# Altium PCB PCB1.PcbDoc
Units mil, origin at the board's own origin, x right, y up, seen from the top; angles counter-clockwise.
Board outline 1055 x 1880 mil, 2 copper layers (Top Layer, Bottom Layer); 9 components, 7 nets, 27 pads, 0 vias.
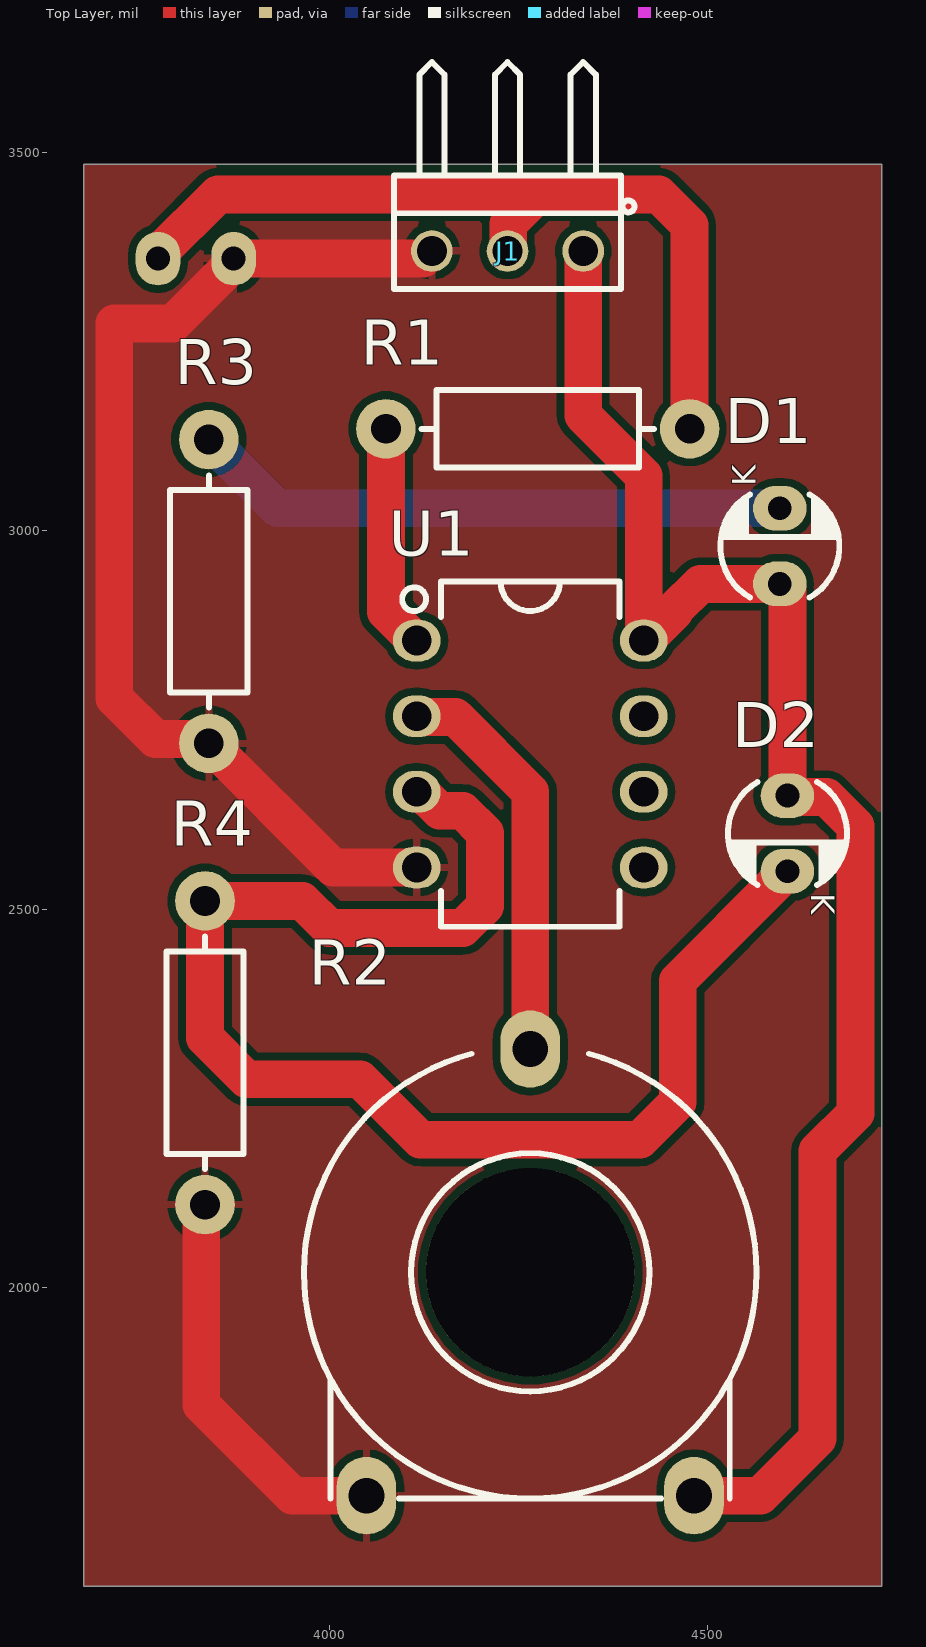
[diagram p0: Top Layer view]
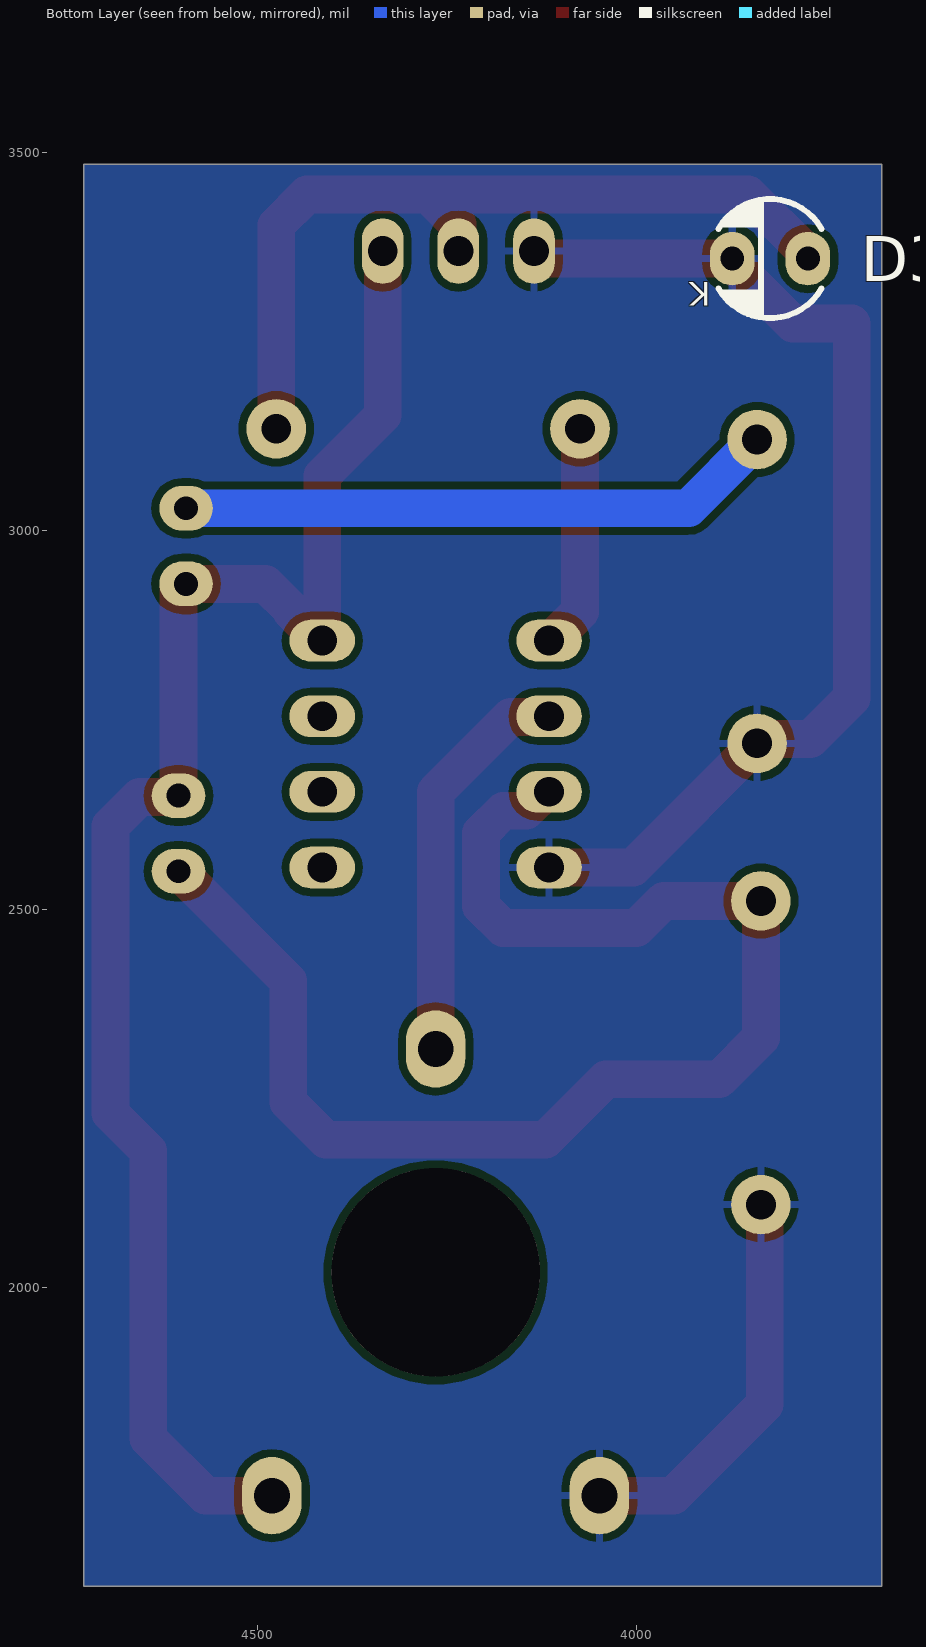
[diagram p1: Bottom Layer view, seen from below]

## Layer stack, top to bottom
Top Solder: solder mask 0.4, Solder Resist, Dk 3.5
Top Layer: signal copper 1.4
Dielectric 1: dielectric 12.6, FR-4, Dk 4.8
Bottom Layer: signal copper 1.4
Bottom Solder: solder mask 0.4, Solder Resist, Dk 3.5

## Board outline
3675,1605 4730,1605 4730,3485 3675,3485

## Design rules (kind name [scope] priority, off if disabled: settings)
Clearance [All] p1: gap=10 ignorepadtopadclearanceinfootprint=FALSE
PolygonConnect [All] p1: connectstyle=Relief reliefconductorwidth=10 reliefentries=4 polygonreliefangle="90 Angle" airgapwidth=10
RoutingVias [All] p1: holewidth=28 width=50 viastyle="Through Hole" minholewidth=28 minwidth=50 maxholewidth=28 maxwidth=50
SolderMaskExpansion [All] p1: expansion=4 istentingtop=FALSE
SupplyNets "Schematic Supply Nets_1" [InNet('VCC')] p1: voltage=0.000
SupplyNets "Schematic Supply Nets" [InNet('GND')] p2: voltage=0.000
Width [All] p1: maxlimit=50 minlimit=10 preferedwidth=30 minimp=50.000000 maximp=50.000000 favimp=50.000000
30 further rules are at their usual default settings.

## Components (designator, comment, footprint, x,y, rotation, side; value= is the part's Value field where it differs from the comment)
D1 "PHDIODE_TX" LED3MM 4595,2980 r90 top
D2 "PHDIODE_RX" LED3MM 4605,2600 r270 top
D3 "LED3MM" LED3MM 3822.89,3360 r0 bottom
J1 "HDRM3" HDRR_M_1X3 4235,3370 r180 top
R1 "330 ohm" R025W_AX04 4275,3135 r180 top
R2 "POT4.7K" POT_PIHER15MM 4265,2019.72 r0 top
R3 "100 ohm" R025W_AX04 3840,2920 r90 top
R4 "10K" R025W_AX04 3835,2310 r90 top
U1 "LM358" DIP_8 4265,2705 r0 top

## Footprints (in the part's own frame and the unit in brackets; to place one, negate y for a bottom-side part, rotate by r counter-clockwise, add the part's x,y. Pads: shape width x height; smd on the part's side, far side on the other; paste and mask are expansions set on the pad)
DIP_8 [mm] "DIP, pitch 2.54mm, 300mil Width"
  oval 1.6x1.4 / inner round 1.4 / far side oval 2.2x1.4 hole 1: 1(-3.81,3.81) 2(-3.81,1.27) 3(-3.81,-1.27) 4(-3.81,-3.81) 5(3.81,-3.81) 6(3.81,-1.27) 7(3.81,1.27) 8(3.81,3.81)
  silkscreen extent -4.3,-5.8 3,5.8, body extent -3.94,-5.7 3.94,5.73, height 4.19
HDRR_M_1X3 [mm] "Connector; Header; 3 Position; Right Angle"
  round 1.4 / inner round 1.4 / far side oval 1.4x2.2 hole 1: 1(-2.54,0) 2(0,0) 3(2.54,0)
  silkscreen extent -4.26,-6.35 3.81,1.27, body extent -3.81,-7.35 3.81,1.27, height 5.45
LED3MM [mm] "LED THD 3MM"
  oval 1.5x1.8 hole 0.8: 1(-1.27,0) 2(1.27,0)
  silkscreen extent -1.73,-2 1.73,2, body extent -1.9,-1.9 1.6,1.9, height 6.5
POT_PIHER15MM [mm] "POT, TRIM, PIHER PT-15 15mm"
  oval 2x2.6 hole 1.2: 1(-5.5,-7.5) 2(0,7.5) 3(5.5,-7.5)
  round 7 hole 7 unplated mask+0.1: ""(0,0)
  silkscreen extent -7.6,-7.6 7.6,7.34, body extent -7.5,-7.7 7.5,7.7, height 6.97
R025W_AX04 [mm] "RESISTOR 1/4 WATT, AXIAL0.4"
  round 2 hole 1: 1(-5.1,0) 2(5.1,0)
  silkscreen extent -3.9,-1.3 3.9,1.3, body extent -5.38,-1.28 5.38,1.28, height 2.6

## Part data
D1: "LED, Infrared Transmitter", MANF=-, MANF_P#=-, PARAM=-, PARAM2=-, PRICE=100toman@JAVAN
D2: "LED, Infrared Receiver", MANF=-, MANF_P#=-, PARAM=-, PARAM2=-, PRICE=100toman@JAVAN
D3: library part LED_THD_3MM, "LED, THD, 3MM, GREEN", ASSEMBLY=ASSEMBLY, DESC=DESCRIPTION, MANF=MANF, MANF_P#=MANF_PART#, PARAM2=2.2V, PRICE=PRICE
J1: library part HDRR_M_1X3, "CONN, HEADER, RightAngle, Male, pitch: 2.54mm, 3POS"
R1 R3 R4: library part RES_THD, "RESISTOR, THD", ASSEMBLY=ASSEMBLY, DESC=DESCRIPTION, DIST#=MOUSER, MANF="KOA SPEER", MANF_P#=RK73H1ETTP4701F, PARAM=0.063W, PARAM2=1%, PRICE="100= 0.5$"
R2: library part RES_THD_POT_PT15, "RESISTOR, THD, Potentiometer, PT-15 15mm", MANF=PIHER, MANF_P#=PT15NV15, PARAM="20%, -25~70oC", PARAM2=150mW, PRICE=0.6$
U1: library part LM358_DIP8, "AMP, Dual, Low-Power", MANF="Texas Instruments, Fairchild", MANF_P#=LM358AN, PARAM2="3 V ~ 32 V, ±1.5 V ~ 16 V", PRICE=-

## Nets (pads, with @x,y where several pads share a name; then routed paths per layer and width w, separated by ;. In a path a pad name is that pad's centre, name@x,y a point inside that pad or via, vN(x,y) a via of type N, cw(c..) or ccw(c..) an arc to the next point about the centre after c; other vN are vias at no path point)
GND: D3.2 J1.3 R2.1 R3.1 R4.1 U1.4 | length 1985.6
  Top Layer w50: R4.1 3830,2104.21 3830,1845 3950.55,1724.45 R2.1 ; U1.4 4004.21,2555 R3.1 3834.5,2724.71 3769.58,2724.71 3715,2779.29 3715,3274.09 3792.89,3274.09 3872.89,3354.09 D3.2 4123.61,3360 4133.61,3370 J1.3
NetD1_2: D1.2 R3.2 | length 792.6
  Bottom Layer w50: R3.2 3930.79,3030 D1.2
NetD2_2: D2.2 R4.2 U1.3 | length 1855.4
  Top Layer w50: U1.3 4120.32,2655 4145.32,2630 4175.71,2630 4205,2600.71 4205,2504.29 4175.71,2475 3999.36,2475 3963.57,2510.79 R4.2 3835,2330 3890,2275 4040,2275 4120,2195 4410,2195 4460,2245 4460,2405 4597.36,2542.36 4597.36,2545.82 4601.54,2550 D2.2
NetD3_1: D3.1 J1.2 R1.1 | length 1119.2
  Top Layer w50: D3.1 3772.89,3365.91 3851.98,3445 4275,3445 ; J1.2 4235.98,3370.98 4235.98,3405.98 4275,3445 ; R1.1 4475.79,3404.21 4435,3445 4275,3445
NetR1_2: R1.2 U1.1 | length 298.4
  Top Layer w50: R1.2 4074.21,2893.24 4112.45,2855 U1.1
NetR2_2: R2.2 U1.2 | length 531.4
  Top Layer w50: U1.2 4115.98,2754.02 4165.98,2754.02 4265,2655 R2.2
VCC: D1.1 D2.1 J1.1 R2.3 U1.8 | length 2178.9
  Top Layer w50: J1.1 4335,3152.99 4415,3072.99 U1.8 4417.55,2855 4455.27,2892.72 4455.27,2895.27 4490,2930 D1.1 4598.46,2930 4605,2923.46 D2.1 4606.73,2648.27 4656.73,2648.27 4695,2610 4695,2230 4645,2180 4645,1800 4569.45,1724.45 R2.3
pads on no net: R2. U1.5 U1.6 U1.7

## Polygon pours and split planes (outlines as drawn)
GND on Top Layer "GND_L01_P000" (solid, pour order 0): 3675,1605 4730,1605 4730,3485 3675,3485
GND on Bottom Layer "GND_L02_P001" (solid, pour order 1): 3675,1605 4730,1605 4730,3485 3675,3485

## Text inside footprints (layer, text, board x,y; h text height)
D1: Top Overlay "K" at 4563.5,3058.74 h31.5 r90
D2: Top Overlay "K" at 4636.5,2521.26 h31.5 r270
D3: Bottom Overlay "K" at 3901.63,3328.5 h31.5 r180